# Altium PCB PD1_75.PcbDoc
Units mil, origin at the board's own origin, x right, y up, seen from the top; angles counter-clockwise.
Board outline 4000 x 4000 mil, 2 copper layers (Top Layer, Bottom Layer); 42 components, 34 nets, 240 pads, 155 vias.
Unrouted connection lines stored in the file: 26.
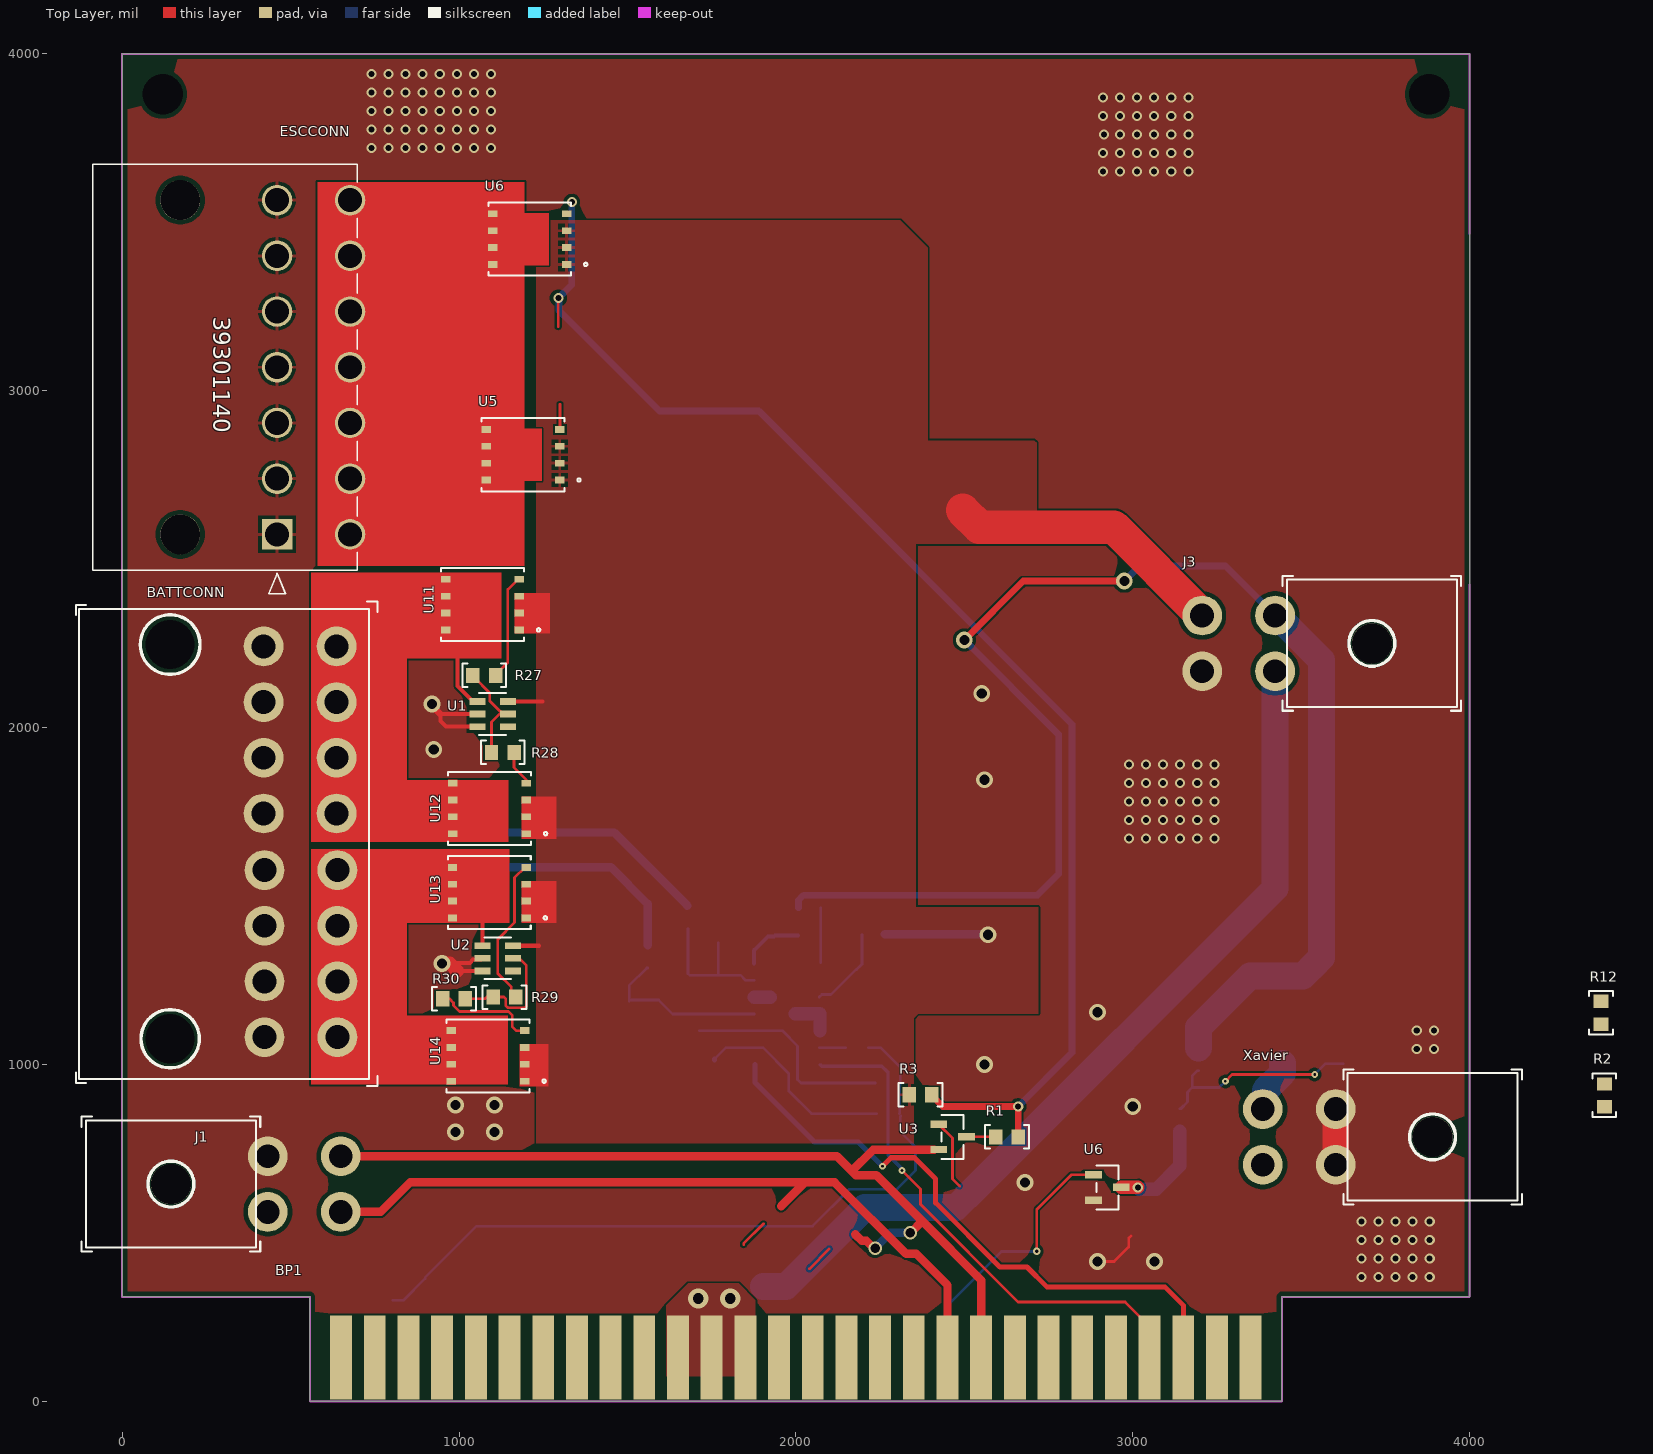
[diagram p0: Top Layer view]
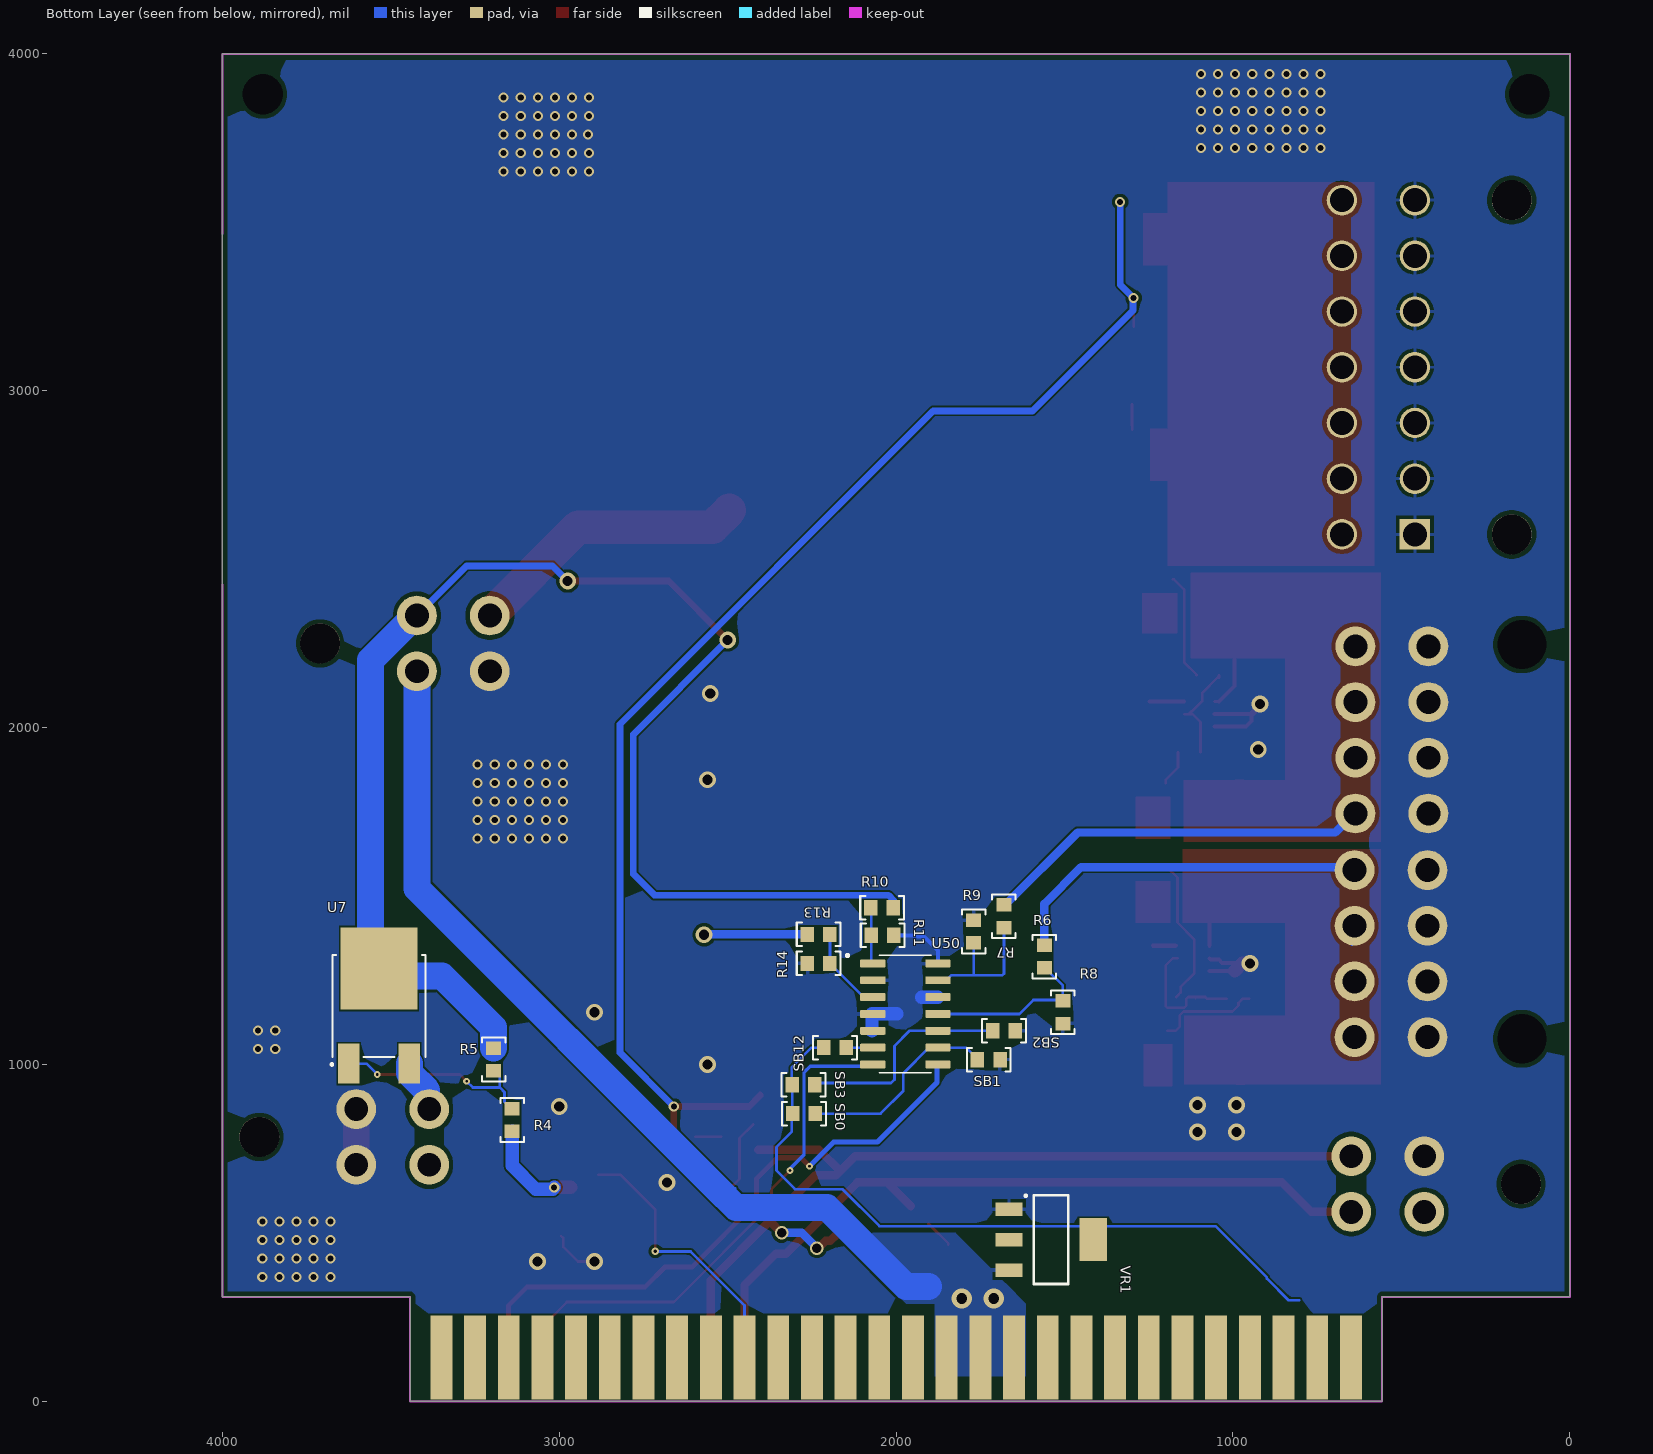
[diagram p1: Bottom Layer view, seen from below]
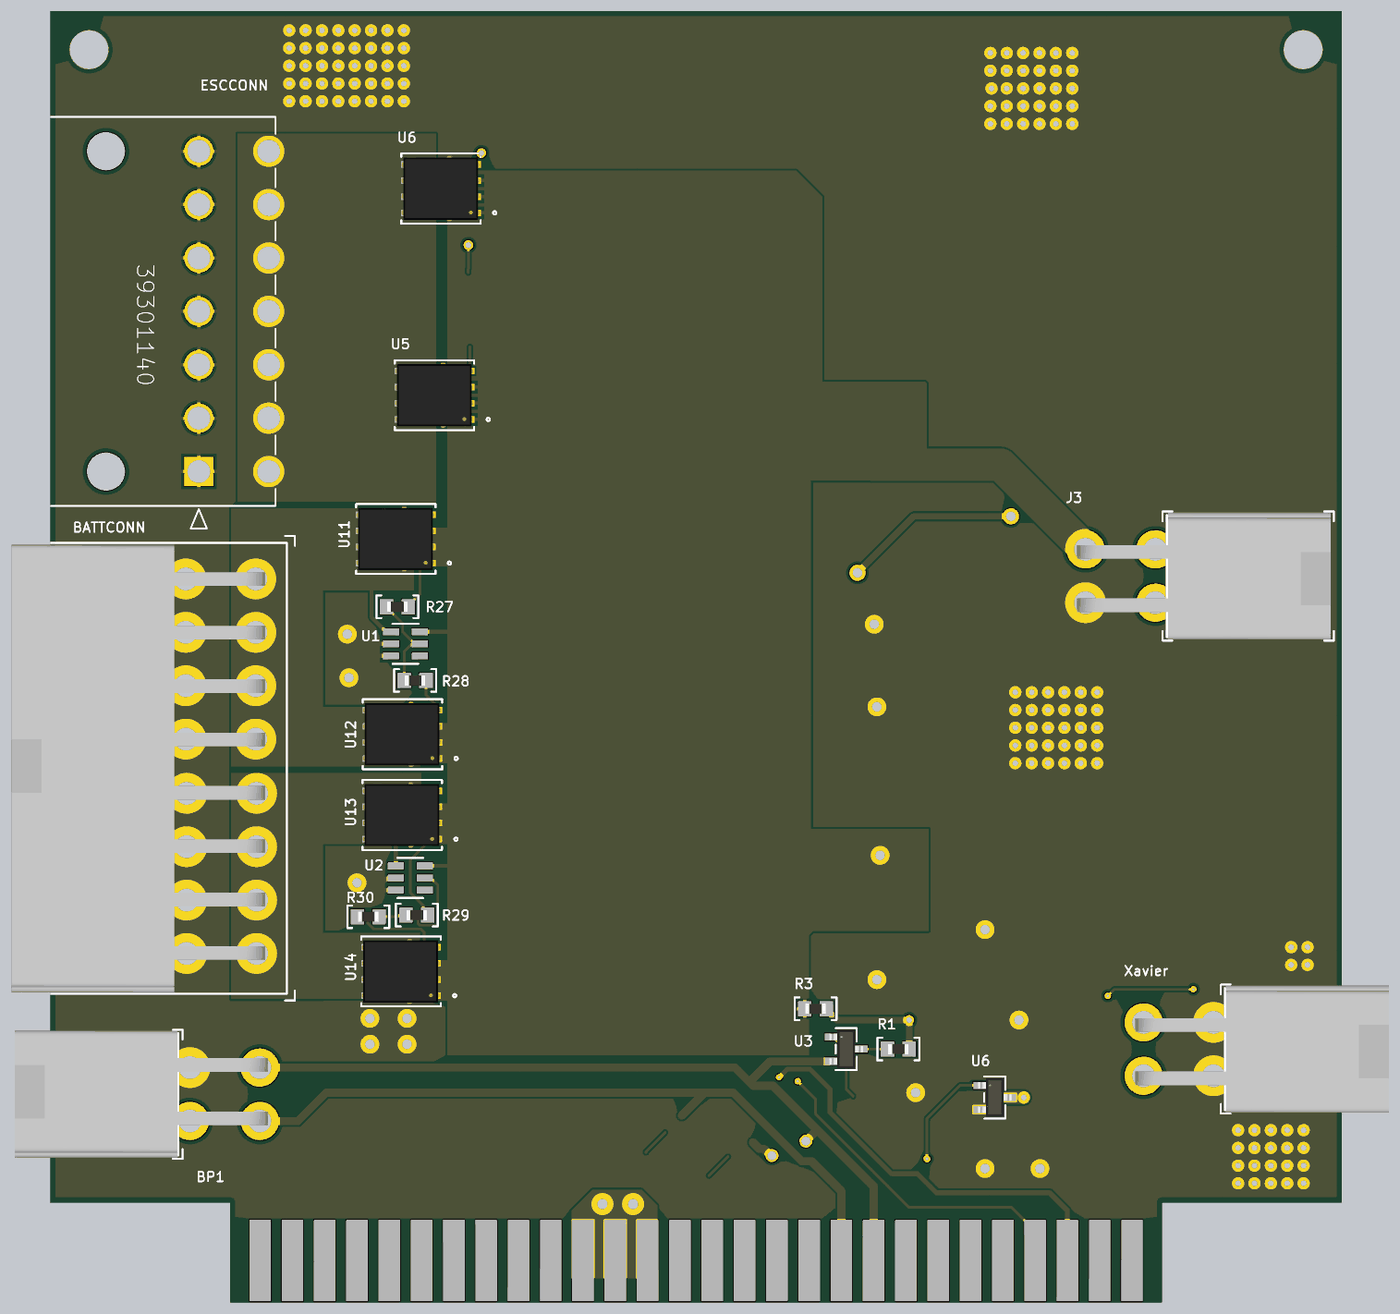
[diagram p2: 3D render of the assembled board from above, using the file's embedded part models]
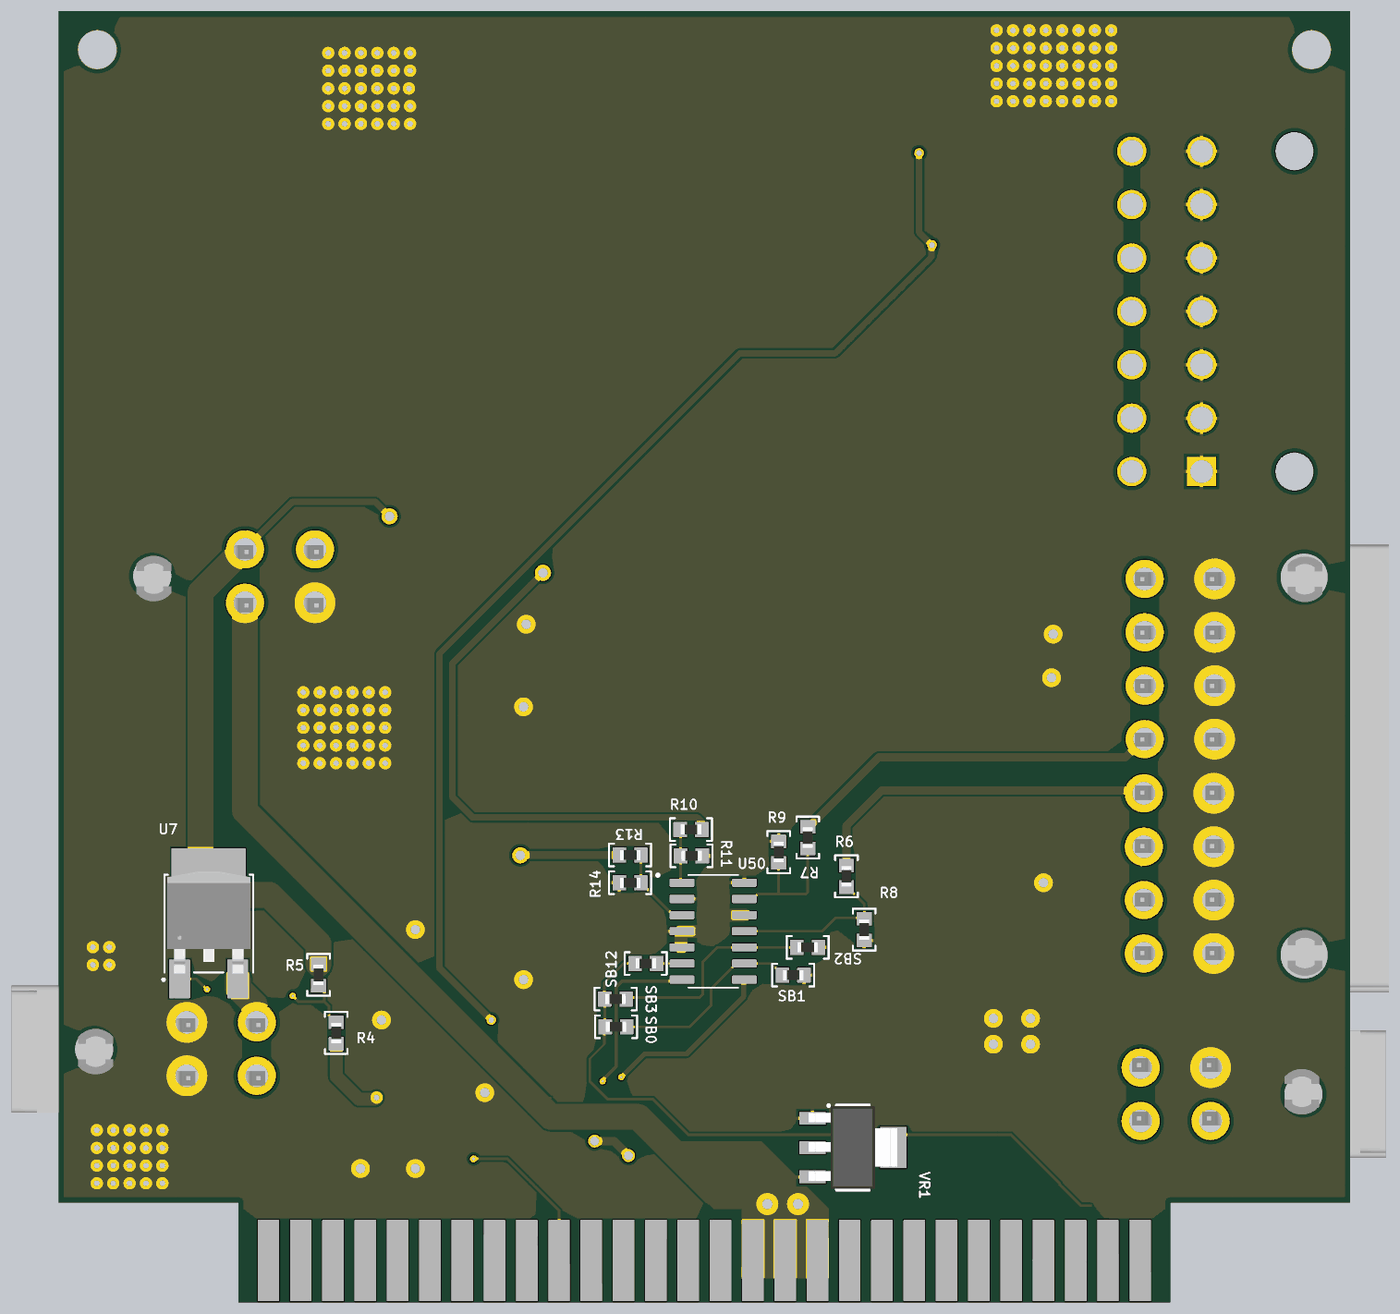
[diagram p3: 3D render of the assembled board from below, using the file's embedded part models]

## Layer stack, top to bottom
Top Solder: solder mask 0.4, Solder Resist, Dk 3.5
Top Layer: signal copper 1.4
Dielectric 1: dielectric 12.6, FR-4, Dk 4.8
Bottom Layer: signal copper 1.4
Bottom Solder: solder mask 0.4, Solder Resist, Dk 3.5

## Board outline
557,0 557,310 0,310 0,4000 4000,4000 4000,3465 4000,2425 4000,310 3443,310 3443,0

## Design rules (kind name [scope] priority, off if disabled: settings)
AcuteAngle [All] p1: minimum=8.75000000000000E+0001 checktracksonly=FALSE
BoardOutlineClearance [All] p1: gap=16 ignorepadtopadclearanceinfootprint=FALSE
Clearance [InNetClass('HighPower') vs InNetClass('HighPower')] p1: gap=20 ignorepadtopadclearanceinfootprint=FALSE
Clearance "Clearance JLCPCB" [All] p2: gap=6 ignorepadtopadclearanceinfootprint=FALSE except(3.5: Arc-Arc Arc-Track Track-Track; 5: Arc-SMDPad Track-SMDPad SMDPad-SMDPad; 10: Arc-Via Arc-Hole Track-Via Track-Hole Via-Via Via-Fill Via-Poly Via-Region Fill-Hole Poly-Hole Region-Hole; 12.99: Arc-THPad Track-THPad; 13: THPad-Fill THPad-Poly THPad-Region; 20: THPad-THPad)
ComponentOrientations [All] p1: allowedrotations=32
DiffPairsRouting "USB 2.0" [InDifferentialPairClass('USB 2.0')] p1: maxlimit=4 minlimit=4 mostfreqgap=4 toplayer_minwidth=9 toplayer_maxwidth=9 toplayer_prefwidth=9 bottomlayer_minwidth=9 bottomlayer_maxwidth=9 bottomlayer_prefwidth=9 impedanceprofiledriven=TRUE impedanceprofileid={B279FAB8-9179-4BDF-8125-EF1A8961339F} maxuncoupledlength=500
DiffPairsRouting [All] p2: maxlimit=10 minlimit=10 mostfreqgap=10 toplayer_minwidth=15 toplayer_maxwidth=15 toplayer_prefwidth=15 bottomlayer_minwidth=15 bottomlayer_maxwidth=15 bottomlayer_prefwidth=15 maxuncoupledlength=500
FanoutControl Fanout_Default [All] p5: bgadir=Out bgaviamode=Centered fanoutstyle=Auto fanoutdirection=OutOnly viagrid=1 // Fanout_Default (Default Rule)
HoleSize "HoleSize JLCPCB" [All] p1: absolutevalues=TRUE maxlimit=245 minlimit=8 maxpercent=80.000 minpercent=20.000
HoleToHoleClearance "HoleToHoleClearance JLCPCB" [All] p1: gap=20 allowstackedmicrovias=TRUE
MinimumAnnularRing "MinimumAnnularRing JLCPCB" [All] p1: minimumring=6
MinimumSolderMaskSliver [All] p1 off: minsoldermaskwidth=10
PasteMaskExpansion [All] p1: expansion=1
PolygonConnect EdgeConnect [(IsNamedPolygon('PolygonDirect'))] p1: connectstyle=Direct reliefconductorwidth=10 reliefentries=4 polygonreliefangle="90 Angle" airgapwidth=10
PolygonConnect [All] p2: connectstyle=Relief reliefconductorwidth=10 reliefentries=4 polygonreliefangle="90 Angle" airgapwidth=10
RoomDefinition M1_75S [InComponentClass('M1_75S')] p1: confinementstyle=ConfineIn formatcopy=TRUE lockcomponents=FALSE outline -1000,-1000 1000,-1000 1000,0 -1000,0
RoomDefinition M1_75S2 [InComponentClass('M1_75S2')] p2: confinementstyle=ConfineIn formatcopy=TRUE lockcomponents=FALSE outline -1000,-1000 1000,-1000 1000,0 -1000,0
RoutingVias "RoutingVias JLCPCB" [All] p1: holewidth=10 width=22 viastyle="Through Hole" minholewidth=8 minwidth=20 maxholewidth=28 maxwidth=40
SMDEntry [All] p1: side=TRUE corner=TRUE anyangle=FALSE
SMDToCorner [All] p1: distance=0
SMDToPlane [All] p1: distance=0
SilkToSilkClearance [All] p1: silktosilkclearance=1
SilkToSolderMaskClearance "SilkToSolderMaskClearance JLCPCB" [IsPad] p1: minsilkscreentomaskgap=6 clearancetoexposedcopper=TRUE
SolderMaskExpansion [All] p1: expansion=4 istentingtop=FALSE
UnRoutedNet [All] p1: checkbadconnections=TRUE
Width "Width JLCPCB 1oz" [All] p1: maxlimit=100 minlimit=3.5 preferedwidth=8 minimp=50.000000 maximp=50.000000 favimp=50.000000
21 further rules are at their usual default settings.

## Classes and differential pairs
component class M1_75S2: ? BATTCONN BATTERYCONNECTOR? BP1 ESC_CONN? ESCCONN J1 J3 R6 R7 R8 R9 R10 R11 R13 R14 SB0 SB1 SB2 SB3 SB12 U50 VR1 Xavier
component class M1_75S: ? BATTERYCONNECTOR? ESC_CONN? R1 R3 R4 R5 R12 R27 R28 R29 R30 U1 U2 U3 U5 U6 U7 U11 U12 U13 U14

## Components (designator, comment, footprint, x,y, rotation, side; value= is the part's Value field where it differs from the comment)
BATTCONN "BatteryConnector" "CONN_MOLEX_MINIFIT JR_16 POS_R/A - duplicate" 142.6,1906.42 r270 top
BP1 "Backplane Connector" BACKPLANE_EDGE_CONN 650,130 r0 top
ESCCONN "39301140" CON_39301140 460,2573.58 r270 top
J1 "4 POS R/A" "CONN_MOLEX_MINIFIT JR_4 POS_R/A" 145,645 r270 top
J3 "4 POS R/A" "CONN_MOLEX_MINIFIT JR_4 POS_R/A" 3710,2250 r90 top
R1 "10k Ohm 5% 1/10W" RESISTOR_0603 2626.5,785 r180 top
R2 "10k Ohm 5% 1/10W" RESISTOR_0603 4400,908.5 r270 top
R3 "10k Ohm 5% 1/10W" RESISTOR_0603 2370,910 r0 top
R4 "10k Ohm 5% 1/10W" RESISTOR_0603 3140,835 r270 bottom
R5 "10k Ohm 5% 1/10W" RESISTOR_0603 3195,1015 r270 bottom
R6 "100 Ohm 5% 1/8W" RESISTOR_0603 1560,1320 r270 bottom
R7 "100 Ohm 5% 1/8W" RESISTOR_0603 1680,1440 r270 bottom
R8 "100 Ohm 5% 1/8W" RESISTOR_0603 1505,1155 r270 bottom
R9 "100 Ohm 5% 1/8W" RESISTOR_0603 1770,1395 r90 bottom
R10 "100 Ohm 5% 1/8W" RESISTOR_0603 2041.5,1465 r0 bottom
R11 "100 Ohm 5% 1/8W" RESISTOR_0603 2040,1383.42 r180 bottom
R12 "10k Ohm 5% 1/10W" RESISTOR_0603 4390,1153.5 r90 top
R13 "100 Ohm 5% 1/8W" RESISTOR_0603 2230,1386.01 r180 bottom
R14 "100 Ohm 5% 1/8W" RESISTOR_0603 2230,1300 r0 bottom
R27 "27 Ohm 5% 1/8W" RESISTOR_0603 1075,2155 r180 top
R28 "27 Ohm 5% 1/8W" RESISTOR_0603 1130,1926.51 r180 top
R29 "27 Ohm 5% 1/8W" RESISTOR_0603 1135,1200 r180 top
R30 "27 Ohm 5% 1/8W" RESISTOR_0603 985,1195 r0 top
SB0 "0 Ohm Jumper No Fit" RESISTOR_0603 2273.5,854 r180 bottom
SB1 "0 Ohm Jumper No Fit" RESISTOR_0603 1725,1013.99 r180 bottom
SB2 "0 Ohm Jumper No Fit" RESISTOR_0603 1680,1100 r180 bottom
SB3 "0 Ohm Jumper No Fit" RESISTOR_0603 2275,940 r180 bottom
SB12 "0 Ohm Jumper No Fit" RESISTOR_0603 2181.5,1050 r0 bottom
U1 "LTC4412ES6TRPBF" TSOT-23_S6 1100,2040 r0 top
U2 "LTC4412ES6TRPBF" TSOT-23_S6 1115,1315 r0 top
U3 "AO3404A" SOT-23-3 2465,785 r270 top
U5 "SIR167DP-T1-GE3" MOSFET_7DP-T1-GE3_VIS 1190,2810 r180 top
U6 "SIR167DP-T1-GE3" MOSFET_7DP-T1-GE3_VIS 1210,3450 r180 top
U6 "PMV13XNEAR" SOT-23-3 2925,635 r270 top
U7 "MOSFET P-Ch 10.8A TO-252AA" DPAK_ONS 3535,1175 r180 bottom
U11 "SIR167DP-T1-GE3" MOSFET_7DP-T1-GE3_VIS 1070,2365 r180 top
U12 "SIR167DP-T1-GE3" MOSFET_7DP-T1-GE3_VIS 1090.75,1760 r180 top
U13 "SIR167DP-T1-GE3" MOSFET_7DP-T1-GE3_VIS 1090,1510 r180 top
U14 "SIR167DP-T1-GE3" MOSFET_7DP-T1-GE3_VIS 1086.26,1025.48 r180 top
U50 "MCP3428-E/SL" SOIC127P600X175-14N 1972.66,1150 r180 bottom
VR1 "LM1117IMPX-3.3/NOPB" SOT-223-4 1540,480 r180 bottom
Xavier "4 POS R/A" "CONN_MOLEX_MINIFIT JR_4 POS_R/A" 3890,785 r90 top

## Footprints (in the part's own frame and the unit in brackets; to place one, negate y for a bottom-side part, rotate by r counter-clockwise, add the part's x,y. Pads: shape width x height; smd on the part's side, far side on the other; paste and mask are expansions set on the pad)
BACKPLANE_EDGE_CONN [mil]
  rect 65x250 smd far side: 1(0,0) 2(100,0) 3(200,0) 4(300,0) 5(400,0) 6(500,0) 7(600,0) 8(700,0) 9(800,0) 10(900,0) 11(1000,0) 12(1100,0) 13(1200,0) 14(1300,0) 15(1400,0) 16(1500,0) 17(1600,0) 18(1700,0) 19(1800,0) 20(1900,0) 21(2000,0) 22(2100,0) 23(2200,0) 24(2300,0) 25(2400,0) 26(2500,0) 27(2600,0) 28(2700,0)
  rect 65x250 smd: 29(2700,0) 30(2600,0) 31(2500,0) 32(2400,0) 33(2300,0) 34(2200,0) 35(2100,0) 36(2000,0) 37(1900,0) 38(1800,0) 39(1700,0) 40(1600,0) 41(1500,0) 42(1400,0) 43(1300,0) 44(1200,0) 45(1100,0) 46(1000,0) 47(900,0) 48(800,0) 49(700,0) 50(600,0) 51(500,0) 52(400,0) 53(300,0) 54(200,0) 55(100,0) 56(0,0)
CON_39301140 [mm]
  rect 2.3x2.3 hole 1.8 mask+0.076: 1(0,0)
  round 2.3 hole 1.8 mask+0.076: 2(-4.2,0) 3(-8.4,0) 4(-12.6,0) 5(-16.8,0) 6(-21,0) 7(-25.2,0) 8(0,5.5) 9(-4.2,5.5) 10(-8.4,5.5) 11(-12.6,5.5) 12(-16.8,5.5) 13(-21,5.5) 14(-25.2,5.5)
  round 3 hole 3 unplated mask+0.076: M1(0,-7.3) M2(-25.2,-7.3)
  silkscreen extent -27.9,-13.9 4.48,6.03, body extent 0,0 0.25,0.25, height 0.25
"CONN_MOLEX_MINIFIT JR_4 POS_R/A" [mm] "Molex Minifit Jr 5569 4 Pos R/A"
  round 3 hole 1.8: 1(2.1,7.3) 2(-2.1,7.3) 3(2.1,12.8) 4(-2.1,12.8)
  round 3 hole 3 unplated mask+0: ""(0,0)
  silkscreen extent -5.08,-6.73 5.08,6.73, body extent -5,-6.48 5,13.46, height 11.4
"CONN_MOLEX_MINIFIT JR_16 POS_R/A - duplicate" [mm] "Molex Minifit Jr 16 Pos R/A"
  round 3 hole 1.801: 1(20.964,7.112) 2(16.764,7.112) 5(4.1,7.046) 6(-0.1,7.046) 9(20.964,12.612) 10(16.764,12.612) 13(4.1,12.546) 14(-0.1,12.546)
  round 3 hole 1.8: 3(12.564,7.112) 4(8.364,7.112) 7(-4.3,7.046) 8(-8.5,7.046) 11(12.564,12.612) 12(8.364,12.612) 15(-4.3,12.546) 16(-8.5,12.546)
  round 3 hole 3.7 unplated mask+0: ""(-8.636,0) ""(21.082,0)
  silkscreen extent -11.87,-7.11 24.66,15.62, body extent -11.18,-6.67 24.02,13.27, height 11.4
DPAK_ONS [mil]
  rect 63x118 smd: 1(-90,-172.5) 2(90,-172.5)
  rect 228x244 smd: 3(0,109.5)
  silkscreen extent -142,-177 138,150, body extent -129,-156 129,160, height 94
MOSFET_7DP-T1-GE3_VIS [mil]
  rect 28x20 smd paste-10 mask+0: 1(-109.25,75) 2(-109.25,25) 3(-109.25,-25) 4(-109.25,-75) 5(109.25,-75) 6(109.25,-25) 7(109.25,25) 8(109.25,75)
  Top Layer region: 95.25,77 -55.75,77 -55.75,-77 95.25,-77 95.25,-85 123.25,-85 123.25,-65 95.25,-65 95.25,-35 123.25,-35 123.25,-15 95.25,-15 95.25,15 123.25,15 123.25,35 95.25,35 95.25,65 123.25,65 123.25,85 95.25,85
  Top Layer region: 0,-77 0,-77 0,-77 0,-77 0,-77 0,-77 0,-77 0,-77
  Top Layer region: 0,77 0,77 0,77 0,77 0,77 0,77 0,77 0,77
  silkscreen extent -171,-109 123,109, body extent -120,-101 122,101, height 41
RESISTOR_0603 [mil] "Resistor 0603"
  rect 40x45 smd: 1(-33.5,0) 2(33.5,0)
  silkscreen extent -65,-35 65,35, body extent -31,-16 32,16, height 16
SOIC127P600X175-14N [mm]
  rrect25% 1.9x0.6 smd: 1(-2.455,3.81) 2(-2.455,2.54) 3(-2.455,1.27) 4(-2.455,0) 5(-2.455,-1.27) 6(-2.455,-2.54) 7(-2.455,-3.81) 8(2.455,-3.81) 9(2.455,-2.54) 10(2.455,-1.27) 11(2.455,0) 12(2.455,1.27) 13(2.455,2.54) 14(2.455,3.81)
  silkscreen extent -4.45,-4.43 1.95,4.51
SOT-23-3 [mil]
  rect 22x50 smd paste+0 mask+4: 1(-37.5,-41) 2(37.5,-41) 3(0,41)
  silkscreen extent -65,-33 65,33, body extent -60,-52 60,52, height 44
SOT-223-4 [mm]
  rect 2.05x1 smd paste+0 mask+0.102: 1(-3.175,2.3) 2(-3.175,0) 3(-3.175,-2.3)
  rect 2.05x3.25 smd paste+0 mask+0.102: 4(3.175,0)
  silkscreen extent -1.96,-3.35 1.3,3.35, body extent -3.5,-3.25 3.5,3.25, height 1.68
TSOT-23_S6 [mil]
  rect 48x20 smd: 1(-45,37.4) 2(-45,0) 3(-45,-37.4) 4(45,-37.4) 5(45,0) 6(45,37.4)
  silkscreen extent -40,-62 40,62

## Part data
BP1: library part BACKPLANE_EDGE_CONN, "Titan Backplane Edge Connector"
ESCCONN: "No Description Available", Mfr_Name="Molex Connector Corporation", Copyright="Copyright (C) 2022 Ultra Librarian. All rights reserved.", Manufacturer_Part_Number=39301140, RefDes=RefDes, Type=DEV
J1 J3 Xavier: library part "CONN_MOLEX_MINIFIT JR_4POS_R/A", "Molex Minifit Jr. 5569  / 4 Pos R/A Natural", Color=Natural, Current Per Pin=13A, Manufacturer=Molex, Supplier Part Number 1=WM13112-ND, ComponentLink1Description=Datasheet, ComponentLink1URL=https://www.molex.com/pdm_docs/sd/026013115_sd.pdf, Configuration="Right Angle", Created By="Flip B", Number of Positions=4, Pitch=4.2mm, Series="Minifit Jr 5569", Supplier 1=Digi-Key
R1 R2 R3 R4 R5 R12: library part RESISTOR_10K_0603, "RES 10k OHM 5% 1/10W 0603", Digikey Part Numer=CR0603-JW-104ELFTR-ND, Supplier Part Number 1=2019-RK73B1JTTD103JCT-ND, Tolerance="+/- 5%", Value  (Ohms)=10K, ComponentLink1Description=Datasheet, ComponentLink1URL=https://www.bourns.com/docs/product-datasheets/CRxxxxx.pdf, Made By="Robert Pafford", Supplier=Digikey, Supplier 1=Digi-Key, Wattage=1/8W
R6 R7 R13: library part RESISTOR_100_0603, "RES 100 OHM 5% 1/8W 0603", Supplier Part Number 1=2019-RK73B1JTTD101JCT-ND, Tolerance="+/- 5%", Value  (Ohms)=925, ComponentLink1Description=Digikey, ComponentLink1URL=https://www.digikey.com/en/products/detail/koa-speer-electronics-inc/RK73B1JTTD101J/9844701, Made By="Flip B", Supplier 1=Digi-Key, Wattage=1/8W
R8 R9 R11 R14: library part RESISTOR_100_0603, "RES 100 OHM 5% 1/8W 0603", Supplier Part Number 1=2019-RK73B1JTTD101JCT-ND, Tolerance="+/- 5%", Value  (Ohms)=100, ComponentLink1Description=Digikey, ComponentLink1URL=https://www.digikey.com/en/products/detail/koa-speer-electronics-inc/RK73B1JTTD101J/9844701, Made By="Flip B", Supplier 1=Digi-Key, Wattage=1/8W
R10: library part RESISTOR_100_0603, "RES 100 OHM 5% 1/8W 0603", Supplier Part Number 1=2019-RK73B1JTTD101JCT-ND, Tolerance="+/- 5%", Value  (Ohms)=632, ComponentLink1Description=Digikey, ComponentLink1URL=https://www.digikey.com/en/products/detail/koa-speer-electronics-inc/RK73B1JTTD101J/9844701, Made By="Flip B", Supplier 1=Digi-Key, Wattage=1/8W
R27 R28 R29 R30: library part RESISTOR_27_0603, "RES 27 OHM 5% 1/8W 0603", Digikey Part Numer=CR0603-JW-104ELFTR-ND, Supplier Part Number 1=2019-RK73B1JTTD270JCT-ND, Tolerance="+/- 5%", Value  (Ohms)=27, ComponentLink1Description=Datasheet, ComponentLink1URL=https://www.bourns.com/docs/product-datasheets/CRxxxxx.pdf, Made By="Robert Pafford", Supplier=Digikey, Supplier 1=Digi-Key, Wattage=1/8W
SB0 SB1 SB2 SB3 SB12: library part JUMPER_0_0603, "0 Ohm Jumper No Fit for Solder Bridge", Value  (Ohms)=0, ComponentLink1Description=Digikey, ComponentLink1URL=https://www.digikey.com/en/products/detail/koa-speer-electronics-inc/RK73B1JTTD101J/9844701, Made By="Robert Pafford"
U1 U2: "OR Controller Source Selector Switch P-Channel 2:1 TSOT-23-6", Package="SOT-23-6 Analog Devices", Arrow_Europe-Purchase-URL=https://snapeda.com/shop?store=Arrow+Europe&id=4343773, Availability=Good, Check_prices=https://www.snapeda.com/parts/LTC4412ES6%23TRPBF/Analog%20Devices/view-part/4343773/?ref=eda, DigiKey-Purchase-URL=https://snapeda.com/shop?store=DigiKey&id=4343773, MF="Analog Devices", Mouser-Purchase-URL=https://snapeda.com/shop?store=Mouser&id=4343773, MP=LTC4412ES6#TRPBF, Price=None, SnapEDA_Link=https://www.snapeda.com/parts/LTC4412ES6%23TRPBF/Analog%20Devices/view-part/4343773/?ref=snap
U3: "N-Channel 30 V 5.8A (Ta) 1.4W (Ta) Surface Mount SOT-23-3", Amp Rating="5.8 A", Package=SOT23-3L, Power Dissipation="1.4W (Ta)", Supplier Part Number 1=785-1004-1-ND, Created By="Dylan T", FET Type=N-Channel, Manufacturer _Part_Number=AO3404A, Rds (on)="28mOhm @ 5.8A, 10V", SourceLibrary=ON_Semiconductor_2020-01-13, Supplier 1=Digi-Key, Vdss=30V, Vendor="Alpha & Omega Semiconductor Inc.", Vgs (Max)="3V @ 5.8A, 10V", Vgs (th)="3V @ 250µA"
U5 U6 U11 U12 U13 U14: "P-Channel 30 V 60A (Tc) 65.8W (Tc) Surface Mount PowerPAK® SO-8", Mfr_Name=Vishay, Copyright="Copyright (C) 2022 Ultra Librarian. All rights reserved.", Manufacturer_Part_Number=SIR167DP-T1-GE3, RefDes=RefDes, Type=DEV
U6: "N-Channel 20 V 7.3A (Ta) 610mW (Ta), 8.3W (Tc) Surface Mount TO-236AB", Amp Rating="7.3 A", Package=SOT23-3L, Power Dissipation="610mW (Ta), 8.3W (Tc)", Supplier Part Number 1=771-PMV13XNEAR, Created By="Dylan T", FET Type=N-Channel, Manufacturer _Part_Number=PMV13XNEAR, Rds (on)="15mOhm @ 7.3A, 8V", SourceLibrary=ON_Semiconductor_2020-01-13, Supplier 1=Mouser, Vdss="20 V", Vendor="Nexperia USA Inc.", Vgs (Max)="+/- 12 V", Vgs (th)="1.3V @ 250uA"
U7: library part FDD4141, "P-Channel 10.8A (Ta), 50A (Tc) 2.4W (Ta), 69W (Tc) Surface Mount D-PAK (TO-252AA)", Amp Rating="10.8 A", Package="D-PAK (TO-252AA)", Power Dissipation="2.4W (Ta), 69W (Tc)", Supplier Part Number 1=FDD4141CT-ND, Created By="Dylan T", FET Type="P-Channel, Power", Manufacturer_Part_Number=FDD4141, Rds (on)="12.3mOhm @ 12.7A, 10V", SourceLibrary=ON_Semiconductor_2020-01-13, Supplier 1=Digi-Key, Vdss="40 V", Vendor="ON Semiconductor", Vgs (Max)=±20V, Vgs (th)="3V @ 250µA"
U50: "16 Bit Analog to Digital Converter 4 Input 1 Sigma-Delta 14-SOIC", Package="SOIC-14 Microchip", Availability=Unavailable, BuyPart=https://www.snapeda.com/parts/MCP3428-E/SL/Microchip/view-part/13249/?ref=eda, MF=Microchip, MP=MCP3428-E/SL, Price=None, SnapEDA_Link=https://www.snapeda.com/parts/MCP3428-E/SL/Microchip/view-part/13249/?ref=snap
VR1: "800-mA 15-V linear voltage regulator 4-SOT-223 -40 to 125", Package="SOT-223-4 Texas Instruments", Arrow_Electronics-Purchase-URL=https://snapeda.com/shop?store=Arrow+Electronics&id=410186, Availability=Good, DigiKey-Purchase-URL=https://snapeda.com/shop?store=DigiKey&id=410186, MF="Texas Instruments", Mouser-Purchase-URL=https://snapeda.com/shop?store=Mouser&id=410186, MP=LM1117IMPX-3.3/NOPB, Price=None, SnapEDA_Link=https://www.snapeda.com/parts/LM1117IMPX-3.3/NOPB/Texas%20Instruments/view-part/410186/?ref=snap, Texas_Instruments-Purchase-URL=https://snapeda.com/shop?store=Texas+Instruments&id=410186

## Free pads (board coordinates)
  round 60 hole 120: 1(120,3880) 1(3880,3880)

## Via types
v1: diameter 30, hole 18, Top Layer to Bottom Layer, 128 vias
v2: diameter 50, hole 30, Top Layer to Bottom Layer, 18 vias
v3: diameter 20, hole 8, Top Layer to Bottom Layer, 4 vias
v4: diameter 40, hole 28, Top Layer to Bottom Layer, 2 vias
v5: diameter 60, hole 32, Top Layer to Bottom Layer, 2 vias
v6: diameter 22, hole 10, Top Layer to Bottom Layer, 1 vias

## Nets (pads, with @x,y where several pads share a name; then routed paths per layer and width w, separated by ;. In a path a pad name is that pad's centre, name@x,y a point inside that pad or via, vN(x,y) a via of type N, cw(c..) or ccw(c..) an arc to the next point about the centre after c; other vN are vias at no path point)
3V3: R12.2 SB0.1 SB3.1 SB12.2 VR1.2 VR1.4 | length 2152
  Bottom Layer w8: 803.4,300 835,300 899.47,364.47 899.47,368.16 1051.31,520 1415,520 2050,520 2160,630 2300,630 2355,685 2355,755 2310,800 2310,846 SB0.1@2311.5,847.5 ; SB12.2 2251,1050 2310,991 SB3.1@2310,940 ; SB0.1 2308.5,855.5 SB3.1
+5: BP1.11 BP1.12 BP1.13 BP1.44 BP1.45 BP1.46 J3.2 VR1.3 | length 2707.5
  Bottom Layer w8: 2477.5,632.5 2532.5,632.5
  Bottom Layer w80: 1904.36,340.64 1970.64,340.64 2205,575 2475,575 2532.5,632.5 3422.6,1522.6 J3.2
  other v5: 1710,305 1805,305
+12: J3.1 R5.1 R10.1 U7.3 | length 4315.9
  Top Layer w20: v2(2500,2260) 2675,2435 v2(2975,2435)
  Bottom Layer w20: R10.1 2008,1487.5 2023,1502.5 2717.5,1502.5 2780,1565 2780,1980 v2(2500,2260) ; v2(2975,2435) 3020,2480 3275.28,2480 J3.1
  Bottom Layer w80: R5.1 3195,1110 3347.86,1262.86 3505.36,1262.86 U7.3@3547.5,1305 ; J3.1@3424.96,2335.04 3560,2200 3560,1317.5 U7.3@3535,1292.5
AUX_SWITCH: BP1.38 J1.3 | length 2278.1
  Top Layer w25: J1.3 767.32,562.32 855,650 2025,650 ; 1956.03,579.23 2025,648.2 2025,650 ; BP1.38 2450,345 2357.5,437.5 2327.5,437.5 2115,650 2025,650
GND: BATTCONN.1 BATTCONN.2 BATTCONN.3 BATTCONN.4 BATTCONN.5 BATTCONN.6 BATTCONN.7 BATTCONN.8 ESCCONN.1 ESCCONN.2 ESCCONN.3 ESCCONN.4 ESCCONN.5 ESCCONN.6 ESCCONN.7 J1.2 J3.4 R2.1 R8.2 R9.2 R11.2 R14.2 SB1.2 SB2.2 U1.2 U1.3 U2.2 U2.3 U6.2@2884,597.5 U50.2 U50.4 U50.5 U50.12 U50.14 VR1.1 Xavier.1 Xavier.2 | length 1238.7
  Top Layer w8: v2(2895,415) 2945,415 2988.04,458.04 2988.04,484.04 2995,491
  Top Layer w12: v2@972.71,1301.6 1032.6,1301.6 1042,1311 1066,1311 U2.2 ; 995.11,1277.6 U2.3 ; U1.3 962.03,2002.6 944.65,2019.98 944.65,2035.07 920,2059.72 v2(920,2070) 950,2040 U1.2
  Top Layer w40: v2(950,1300) 972.71,1300 995.11,1277.6
  Top Layer w80: J3.4 J3.4@3213.35,2160.03 ; Xavier.2@3602.6,717.32 Xavier.1 Xavier.1@3602.6,882.68
  Bottom Layer w12: U50.14 1876.01,1338.98 1917.03,1380 1935,1380 1938.42,1383.42 R11.2
  Bottom Layer w40: U50.12 1923.89,1200 ; 1998.43,1150 U50.4 2071.65,1150 U50.5@2071.65,1100
  other v1: 3678.66,369.22 3729.38,369.22 3780.09,369.22 3830.81,369.22 3881.52,369.22 3678.66,424.11 3729.38,424.11 3780.09,424.11 3830.81,424.11 3881.52,424.11 3678.66,479 3729.38,479 3780.09,479 3830.81,479 3881.52,479 3678.66,533.89 3729.38,533.89 3780.09,533.89 3830.81,533.89 3881.52,533.89 3843.04,1045.7 3893.75,1045.7 3843.04,1100.59 3893.75,1100.59 2988.57,1670.44 3039.29,1670.44 3090,1670.44 3140.71,1670.44 3191.43,1670.44 3242.14,1670.44 2988.57,1725.33 3039.29,1725.33 3090,1725.33 3140.71,1725.33 3191.43,1725.33 3242.14,1725.33 2988.57,1780.22 3039.29,1780.22 3090,1780.22 3140.71,1780.22 3191.43,1780.22 3242.14,1780.22 2988.57,1835.11 3039.29,1835.11 3090,1835.11 3140.71,1835.11 3191.43,1835.11 3242.14,1835.11 2988.57,1890 3039.29,1890 3090,1890 3140.71,1890 3191.43,1890 3242.14,1890 2911.43,3650.44 2962.14,3650.44 3012.86,3650.44 3063.57,3650.44 3114.29,3650.44 3165,3650.44 2911.43,3705.33 2962.14,3705.33 3012.86,3705.33 3063.57,3705.33 3114.29,3705.33 3165,3705.33 740,3720.44 790.71,3720.44 841.43,3720.44 892.14,3720.44 942.86,3720.44 993.57,3720.44 1044.29,3720.44 1095,3720.44 2915,3760 2962.14,3760.22 3012.86,3760.22 3063.57,3760.22 3114.29,3760.22 3165,3760 740,3775.33 790.71,3775.33 841.43,3775.33 892.14,3775.33 942.86,3775.33 993.57,3775.33 1044.29,3775.33 1095,3775.33 2911.43,3815.11 2962.14,3815.11 3012.86,3815.11 3063.57,3815.11 3114.29,3815.11 3165,3815.11 740,3830.22 790.71,3830.22 841.43,3830.22 892.14,3830.22 942.86,3830.22 993.57,3830.22 1044.29,3830.22 1095,3830.22 2911.43,3870 2962.14,3870 3012.86,3870 3063.57,3870 3114.29,3870 3165,3870 740,3885.11 790.71,3885.11 841.43,3885.11 892.14,3885.11 942.86,3885.11 993.57,3885.11 1044.29,3885.11 1095,3885.11 740,3940 790.71,3940 841.43,3940 892.14,3940 942.86,3940 993.57,3940 1044.29,3940 1095,3940
  other v2: 3065,415 2680,650 990,800 1105,800 3000,875 990,880 1105,880 2560,1000 2895,1155 2560,1845 925,1935 2551.8,2100.7
Killswitch: BP1.37 J1.4 R12.1 U3.2 | length 2802.9
  Top Layer w25: J1.4 2121.32,727.68 2165.75,683.25 ; 2176.03,496.03 2195.79,476.26 2209.68,476.26 2230.94,455 v4(2235,455) ; v4(2340,500) 2375,535 ; U3.2@2410,746.5 2255,746.5 2229,746.5 2165.75,683.25 ; BP1.37 2550,360 2375,535 ; 2165.75,683.25 2177.5,671.5 2238.5,671.5 2375,535
  Bottom Layer w25: v4(2235,455) 2280,500 v4(2340,500)
"Killswitch Enable": BP1.34 R2.2 U3.1 | length 209.6
  Top Layer w8: U3.1 2465,781.5 2465,660 2486.31,638.69
Motor_Power: ESCCONN.8 ESCCONN.9 ESCCONN.10 ESCCONN.11 ESCCONN.12 ESCCONN.13 ESCCONN.14 U5.5 U5.6 U5.7 U5.8 U6.5 U6.6 U6.7 U6.8
NetBP1_1*6: BP1.1 BP1.2 BP1.3 BP1.54 BP1.55 BP1.56
NetBP1_4*12: BP1.4 BP1.5 BP1.6 BP1.8 BP1.9 BP1.10 BP1.47 BP1.48 BP1.49 BP1.51 BP1.52 BP1.53
NetBP1_31: BP1.31 U50.8 | length 1816.2
  Top Layer w15: v3(2257.4,697.94) 2282.46,723 2352,723 2415,660 2415,589.39 2605.37,399.02 2685.98,399.02 2745,340 3095,340 3150,285 BP1.31
  Bottom Layer w15: U50.8@1878.35,1000 1878.35,946.65 2055,770 2185.34,770 v3(2257.4,697.94)
NetBP1_32: BP1.32 U50.7 | length 1565.7
  Top Layer w8: v3(2315,685.5) 2370,630.5 2370,585 2660,295 2977.5,295 3050,222.5 BP1.32
  Bottom Layer w10: U50.7@2071.65,1000 2076.65,995 2255,995 2273.5,976.5 2273.5,731.5 2315,690 v3(2315,685.5)
NetR1_1: R1.1 R3.2 U5.4 U6.4 | length 4095.4
  Top Layer w8: 1294.25,3190 1294.25,3200 1295,3200.75 v1(1295,3275) ; U5.4 1299.25,2895 1300,2895.75 1300,2959.97
  Top Layer w20: R3.2 2403.5,907.5 2436,875 v1(2660,875) R1.1
  Bottom Layer w20: v1(1335,3560) 1335,3315 v1(1295,3275) 1296.91,3273.09 1296.91,3238.09 1594.97,2940.03 1889.97,2940.03 2820,2010 2820,1035 v1(2660,875)
NetR1_2: R1.2 U3.3 | length 76.5
  Top Layer w8: U3.3@2520,785 R1.2@2596.5,785
NetR4_1: R4.1 R5.2 U7.1 | length 616.6
  Top Layer w8: v3(3275,950) 3295,970 v3(3540,970)
  Bottom Layer w8: R4.1 3142.5,868.5 3162.5,888.5 3162.5,917.5 3176.5,931.5 ; R5.2 3192.5,981.5 3176.5,965.5 3176.5,931.5 ; v3(3275,950) 3256.5,931.5 3176.5,931.5 ; v3(3540,970) 3572.5,1002.5 U7.1
NetR4_2: R4.2 U6.3@2966,635 | length 306.6
  Top Layer w40: U6.3@2966,635 v1(3015,635)
  Bottom Layer w40: v1(3015,635) 3020,630 3070,630 3140,700 R4.2
NetR6_2: R6.2 R8.1 U50.11 | length 509.7
  Bottom Layer w8: R8.1 1505,1234 1557.5,1286.5 R6.2 ; R8.1@1506.01,1191.5 1592.5,1191.5 1634,1150 U50.11@1876.24,1150
NetR7_2: R7.2 R9.1 U50.13 | length 433.7
  Bottom Layer w8: R7.2@1680,1402.51 1680,1269.69 1684.69,1265 1770,1265 ; R9.1 1770,1265 ; U50.13@1876.24,1250 1850.65,1250 1835.65,1265 1770,1265
NetR10_2: R10.2 R11.1 U50.1 | length 163.2
  Bottom Layer w8: U50.1@2073.5,1301.85 R10.2@2073.5,1465
NetR13_2: R13.2 R14.1 U50.3 | length 256.1
  Bottom Layer w8: U50.3 2077.12,1207.81 2104.31,1207.81 2178,1281.5 2180.5,1281.5 2196.5,1297.5 R13.2
NetR27_2: R27.2 R28.2 U1.5 | length 303
  Top Layer w8: R27.2@1041.5,2147.5 R27.2@1041.5,2150 ; R27.2 1041.5,2152.5 1044,2150 1091.25,2102.75 1091.25,2078.75 1124,2046 1125,2046 1130,2041 U1.5@1130,2040 ; R28.2 1096.5,2016.5 1120,2040 1131,2040 U1.5
NetR28_1: R28.1 U12.4 | length 106.6
  Top Layer w8: R28.1 1163.5,1881.5 1200,1845 U12.4
NetR29_1: R29.1 U13.4 | length 444.4
  Top Layer w8: R29.1 1155.19,1213.31 1155.19,1229.81 1115,1270 1115,1371.34 1165,1421.34 1165,1554.75 1195.25,1585 U13.4
NetR29_2: R29.2 R30.2 U2.5 | length 377.4
  Top Layer w8: R30.2 1077.5,1195 1082.5,1200 R29.2 R29.2@1111.5,1200 ; R29.2@1111.5,1197.5 R29.2@1111.5,1200 ; U2.5@1165,1315 1179,1315 1200,1294 1200,1173.19 1195.31,1168.5 1144.77,1168.5 1139.14,1174.14 1139.14,1194.36 1133.5,1200 R29.2@1111.5,1200
NetR30_1: R30.1 U14.4 | length 312
  Top Layer w8: R30.1 971.5,1195 983.5,1183 983.5,1174.77 1001.27,1157 1147.14,1157 1158.33,1145.81 1158.33,1111.67 1169.51,1100.48 U14.4@1191,1100.48 ; U14.4@1195,1100.48 U14.4@1191,1100.48 ; U14.4 U14.4@1191,1100.48
NetSB0_2: SB0.2 SB1.1 U50.9 | length 609.4
  Bottom Layer w8: SB1.1@1758.5,1016.49 1792.01,1050 1876.24,1050 1901.83,1050 1978.89,972.94 1978.89,921.11 2046,854 SB0.2
  Bottom Layer w15: SB1.1 SB1.1@1758.5,1016.49
NetSB2_1: SB2.1 SB3.2 U50.10 | length 643.7
  Bottom Layer w8: SB2.1 U50.10@1876.24,1100 ; U50.10@1878.35,1100 1960,1100 2005,1055 2005,955 2015,945 SB3.2@2236.5,945
NetSB12_1: SB12.1 U50.6 | length 78.7
  Bottom Layer w8: U50.6 SB12.1
PLTACONN: Xavier.4
PORT_BATT: BATTCONN.13 BATTCONN.14 BATTCONN.15 BATTCONN.16 R7.1 U1.1 U11.5 U11.6 U11.7 U11.8 U12.5 U12.6 U12.7 U12.8 | length 1463.5
  Top Layer w8: 945.37,2332.5 995,2282.87 ; U1.1@1041,2077.4 U1.1
  Top Layer w12: 995,2282.87 995,2123.4 U1.1@1041,2077.4
  Bottom Layer w25: BATTCONN.13 640,1745 696.42,1688.58 1460.93,1688.58 R7.1@1678.01,1471.51
STBD_BATT: BATTCONN.9 BATTCONN.10 BATTCONN.11 BATTCONN.12 R6.1 U2.1 U13.5 U13.6 U13.7 U13.8 U14.5 U14.6 U14.7 U14.8 | length 1201.2
  Top Layer w8: 1070,1432.75 1070.25,1433
  Top Layer w12: U2.1 1070,1432.75
  Bottom Layer w8: BATTCONN.12 BATTCONN.12@647.79,1585.78 ; BATTCONN.11@646.54,1355.35 BATTCONN.11@666.18,1375
  Bottom Layer w25: BATTCONN.12@647.79,1585.78 1450.78,1585.78 1560,1476.56 R6.1
V+: J3.3 R3.1 R13.1 R27.1 U1.6 U2.6 U5.1 U5.2 U5.3 U6.1@1319.25,3375 U6.2@1319.25,3425 U6.3@1319.25,3475 U11.1 U11.2 U11.3 U11.4 U12.1 U12.2 U12.3 U13.1 U13.2 U13.3 U14.1 U14.2 U14.3 | length 1633.6
  Top Layer w8: R27.1 1108.5,2157.5 1145,2194 1145,2409.75 1175.25,2440 U11.4
  Top Layer w12: U1.6 1247.4,2077.4 ; U2.6@1170,1352.4 1237.6,1352.4
  Top Layer w100: 2495,2645 2545,2595 2943.74,2595 J3.3
  Bottom Layer w25: R13.1 v2@2570,1386.01
  other v2: 2570,1385
Xavier_OnOff: BP1.19 U6.1@2884,672.5 | length 822.7
  Top Layer w8: v6(2715,445) 2715,570 2817.5,672.5 U6.1@2884,672.5
  Bottom Layer w8: BP1.19 2450,285 2610,445 v6(2715,445)
XavierCONN: U7.2 Xavier.3 | length 159.2
  Bottom Layer w80: Xavier.3 3393.35,874.97 3393.35,923.36 3445,975 U7.2
pads on no net: BATTCONN. BP1.7 BP1.14 BP1.15 BP1.16 BP1.17 BP1.18 BP1.20 BP1.21 BP1.22 BP1.23 BP1.24 BP1.25 BP1.26 BP1.27 BP1.28 BP1.29 BP1.30 BP1.33 BP1.35 BP1.36 BP1.39 BP1.40 BP1.41 BP1.42 BP1.43 BP1.50 ESCCONN.M1 ESCCONN.M2 J1. J1.1 J3. U1.4 U2.4 Xavier.
copper on no net: | length 194.5
  Top Layer w8: 1845,465 1845,468.2 1903.97,527.17 ; 2040,393.2 2098.97,452.17
  Bottom Layer w8: 2350,130 2367.31,147.31

## Polygon pours and split planes (outlines as drawn)
GND on Bottom Layer "GND_L02_P050" (solid, remove dead copper, pour order 46): 561.1,-18.5 561.1,291.5 4.1,291.5 4.1,3981.5 4004.1,3981.5 4004.1,3446.5 4004.1,2406.5 4004.1,291.5 3447.1,291.5 3447.1,-18.5
+5 on Bottom Layer "+5_L02_P003" (solid, pour order 3): 2069.87,500.13 1823.65,500.13 1823.65,498.65 1615,290 1970,290 2125,445
+5 on Bottom Layer "PolygonDirect" (solid, pour order 35): 1615,75 1615,290 1675,350 1835,350 1885,300 1885,75
V+ on Top Layer "V+_L01_P048" (solid, pour order 48): 1230,3505.41 2309.59,3505.41 2391.09,3423.91 2391.09,2851.9 2708.1,2851.9 2714.59,2845.41 2714.59,2545.41 2354.59,2545.41 2356.09,2543.91 2356.09,1466.9 2720,1466.9 2720,1150.41 2362.58,1150.41 2349.59,1137.42 2349.59,765.41 1230,765.41
GND on Top Layer "GND_L01_P049" (solid, remove dead copper, pour order 49): 557,0 557,310 0,310 0,4000 4000,4000 4000,3465 4000,2425 4000,310 3443,310 3443,0
+5 on Top Layer "PolygonDirect" (solid, pour order 7): 1615,75 1615,285 1680,350 1830,350 1880,300 1880,75

## Keep-outs
Keep-Out Layer:
  lines w6: 4000,2425 4000,310 3443,310 3443,0 557,0 557,310 0,310 0,4000 4000,4000 4000,3465

## Other copper
Top Layer:
  region net STBD_BATT: 1150,1420.48 1150,1640 830,1640 830,1420.48
  rectangle net V+: 1180,935 1265,1060
  rectangle net V+: 1185,1420 1290,1545
  rectangle net Motor_Power: 580,2480 1195,3620
  rectangle net V+: 1185,1670 1290,1795
  rectangle net V+: 1165,2280 1270,2400
  rectangle net PORT_BATT: 780,1660 1146.5,1845
  rectangle net PORT_BATT: 765,2205 1125.75,2460
  region net STBD_BATT: 1145,940.48 1145,1145 825,1145 825,940.48
  rectangle net STBD_BATT: 560,940 845,1640
  rectangle net PORT_BATT: 560,1660 845,2460